# Altium PCB [AD-trans] v1.1_2021-09-27.pcbdoc
Units mm, origin at the board's own origin, x right, y up, seen from the top; angles counter-clockwise.
Board outline 149.35 x 127.63 mm, 2 copper layers (Top Layer, Bottom Layer); 27 components, 25 nets, 133 pads, 149 vias.
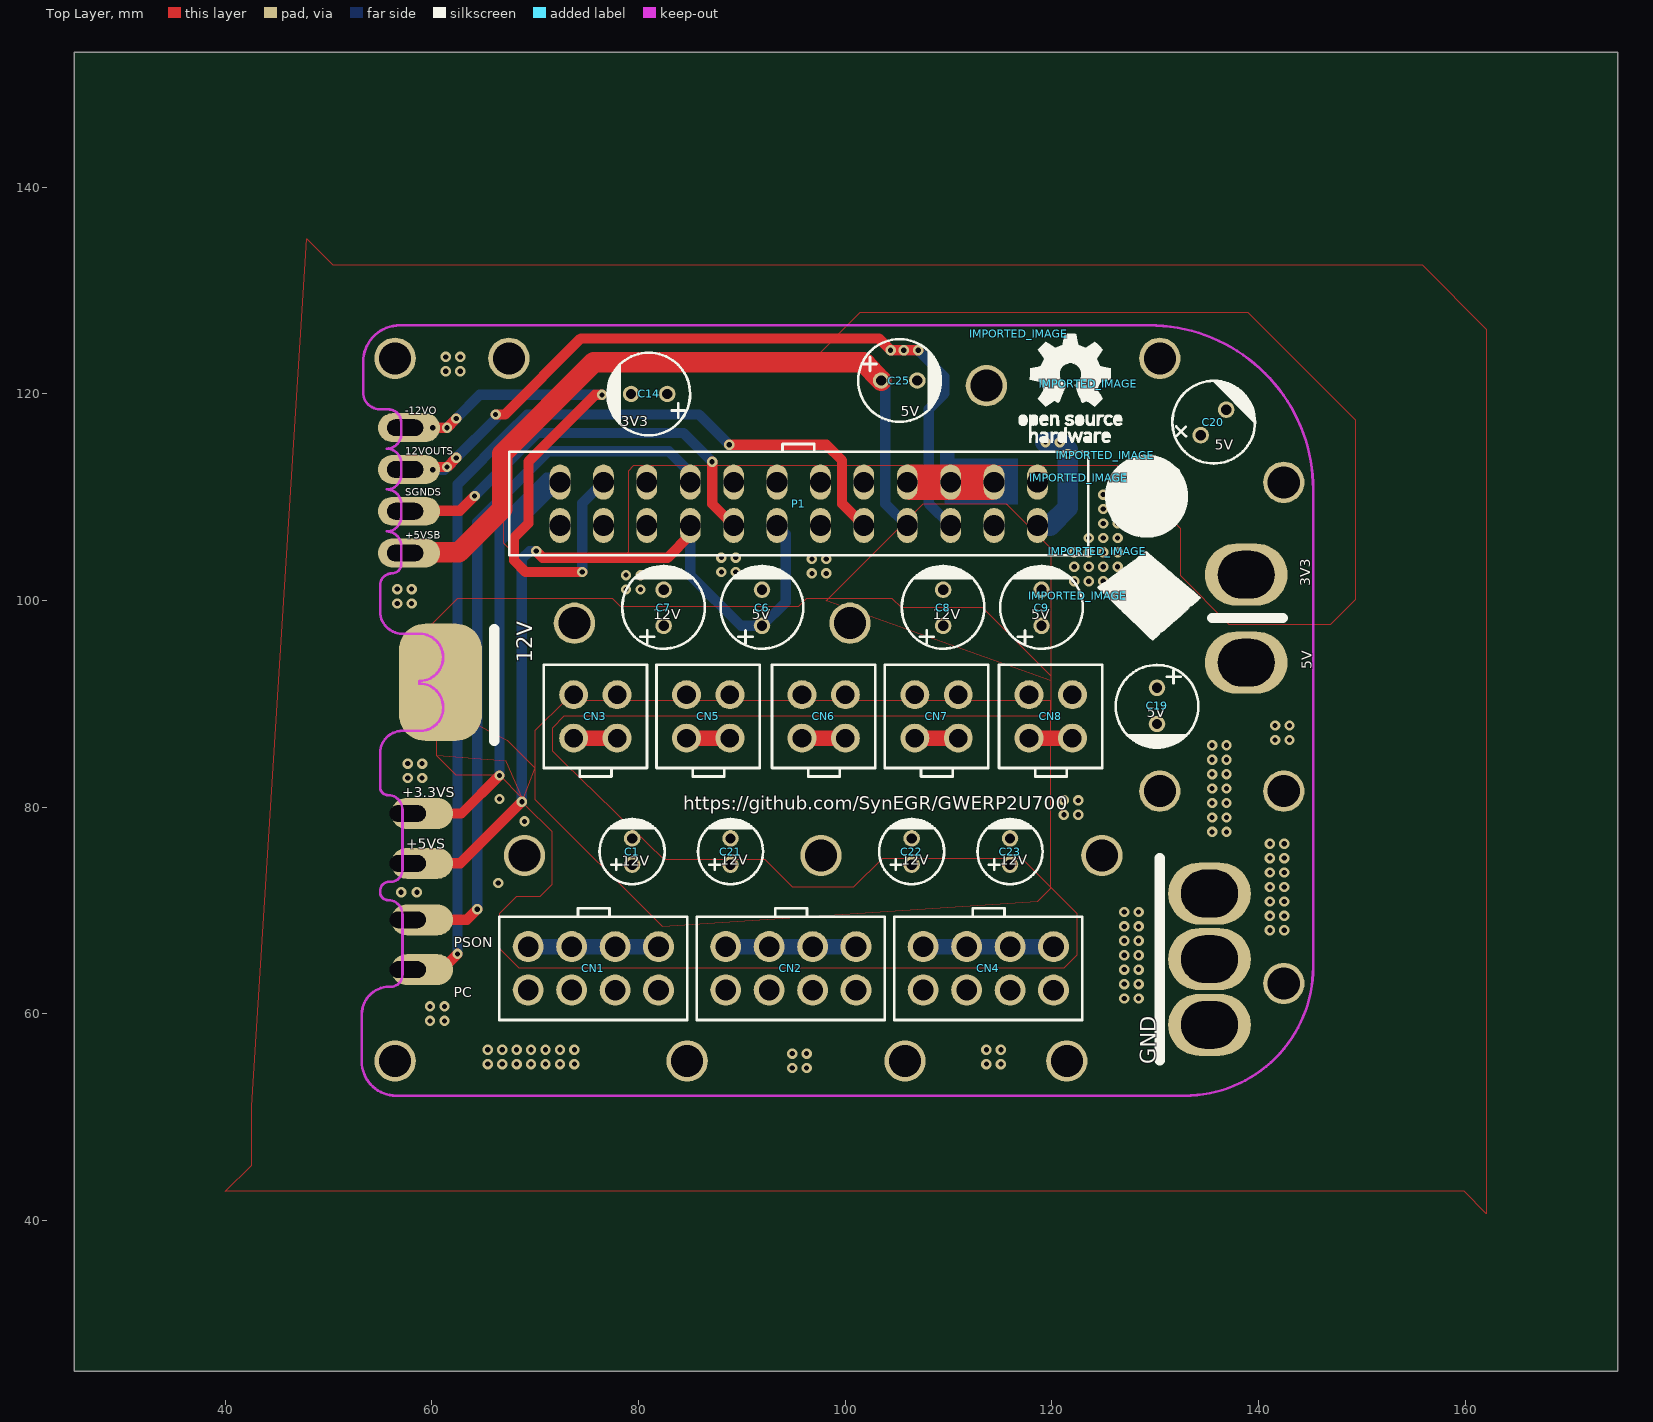
[diagram p0: Top Layer view]
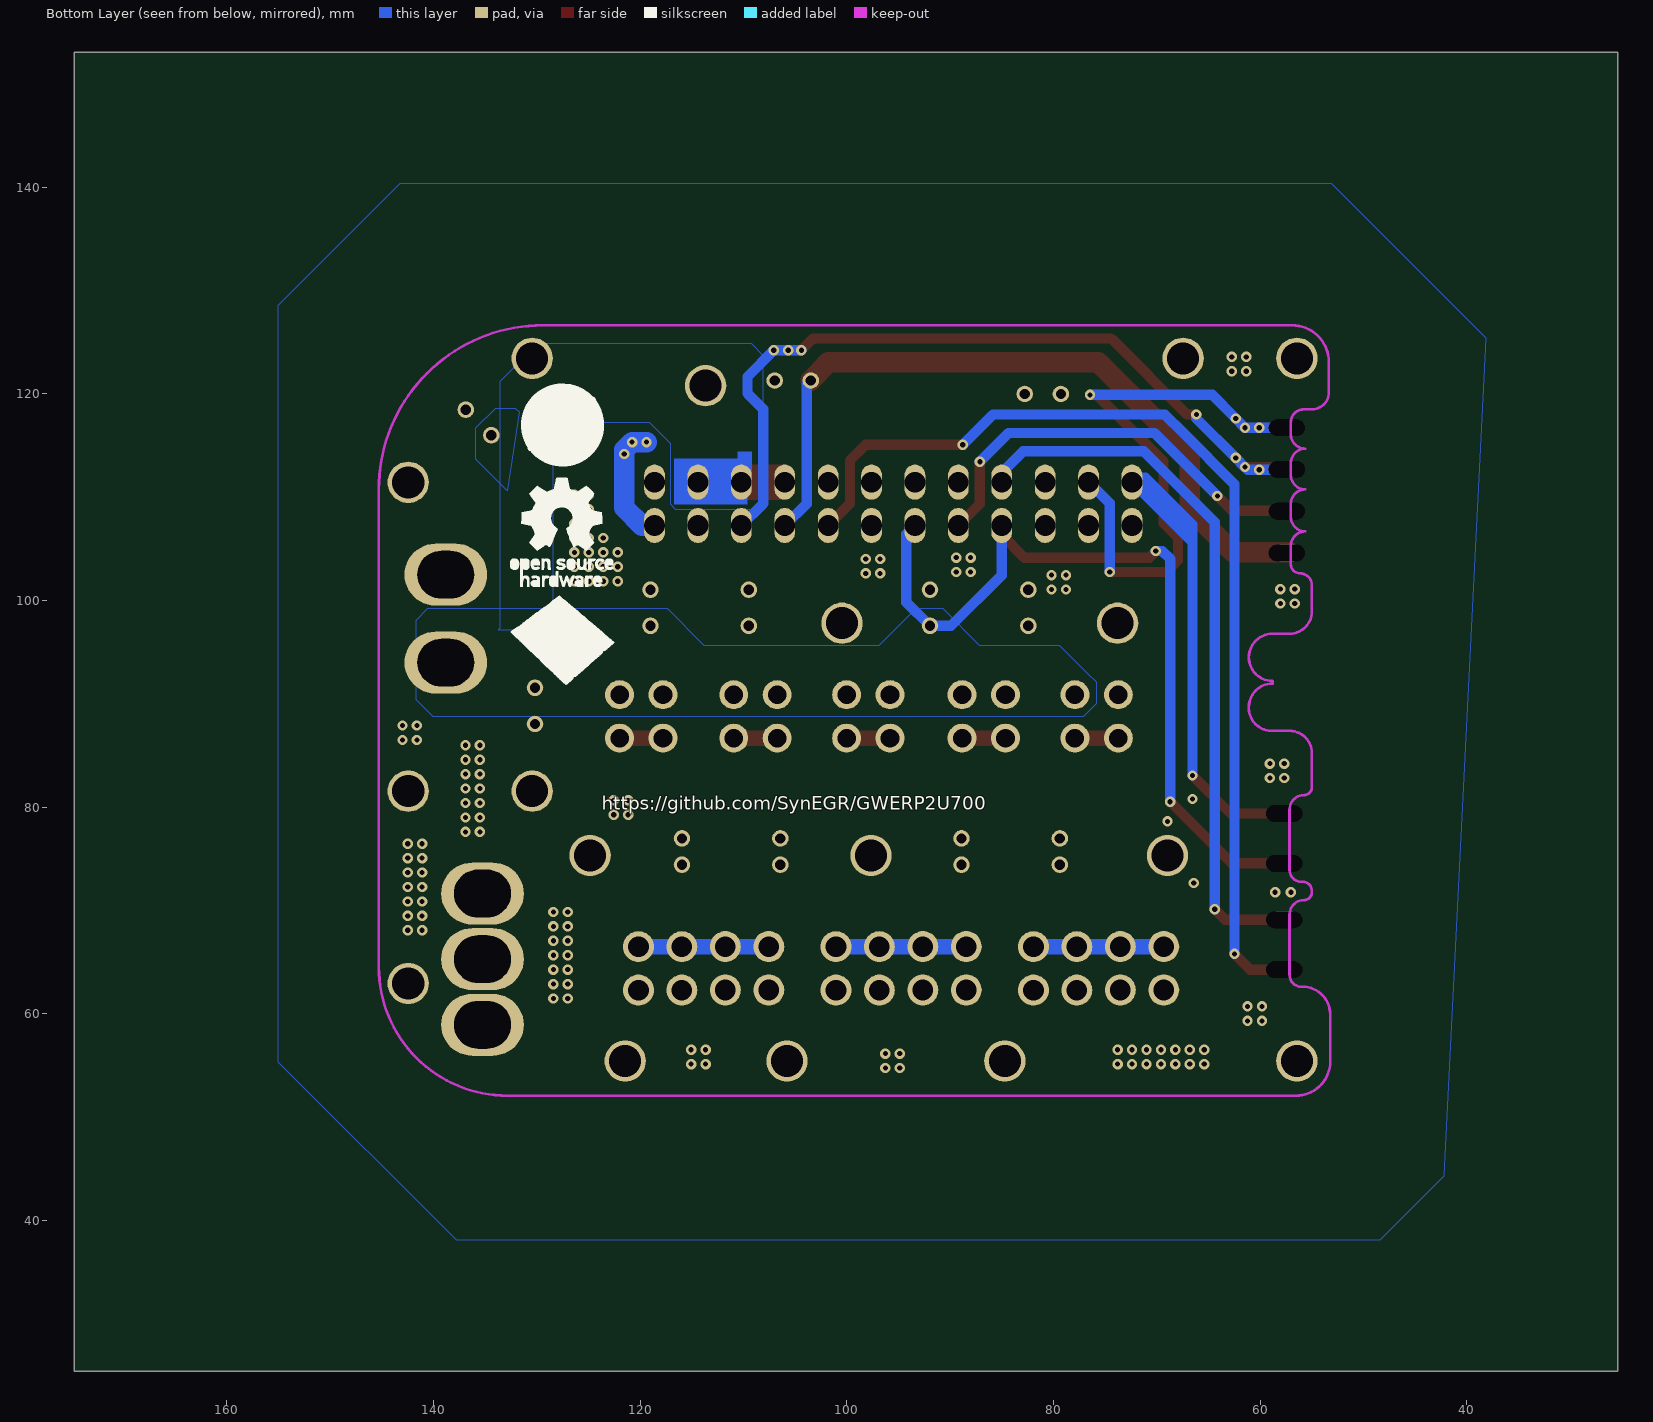
[diagram p1: Bottom Layer view, seen from below]

## Layer stack, top to bottom
Top Layer: signal copper (thickness not stored)
Dielectric: dielectric 0.32, FR-4, Dk 4.8
Bottom Layer: signal copper (thickness not stored)

## Board outline
174.752,25.4 25.4,25.4 25.4,153.035 174.752,153.035

## Components (designator, comment, footprint, x,y, rotation, side; value= is the part's Value field where it differs from the comment)
C1 "CAP-TH_BD6.3-P2.50-D1.0-FD" CAP-TH_BD6.3-P2.50-D1.0-FD 79.375,75.692 r90 top
C6 "CAP-TH_BD8.0-P3.50-D0.6-FD" CAP-TH_BD8.0-P3.50-D0.6-FD 91.948,99.286 r90 top
C7 "CAP-TH_BD8.0-P3.50-D0.6-FD" CAP-TH_BD8.0-P3.50-D0.6-FD 82.423,99.286 r90 top
C8 "CAP-TH_BD8.0-P3.50-D0.6-FD" CAP-TH_BD8.0-P3.50-D0.6-FD 109.474,99.286 r90 top
C9 "CAP-TH_BD8.0-P3.50-D0.6-FD" CAP-TH_BD8.0-P3.50-D0.6-FD 118.999,99.286 r90 top
C14 "CAP-TH_BD8.0-P3.50-D0.6-FD" CAP-TH_BD8.0-P3.50-D0.6-FD 81.026,119.976 r180 top
C19 "CAP-TH_BD8.0-P3.50-D0.6-FD" CAP-TH_BD8.0-P3.50-D0.6-FD 130.175,89.789 r270 top
C20 "CAP-TH_BD8.0-P3.50-D0.6-FD" CAP-TH_BD8.0-P3.50-D0.6-FD 135.636,117.221 r45 top
C21 "CAP-TH_BD6.3-P2.50-D1.0-FD" CAP-TH_BD6.3-P2.50-D1.0-FD 88.9,75.692 r90 top
C22 "CAP-TH_BD6.3-P2.50-D1.0-FD" CAP-TH_BD6.3-P2.50-D1.0-FD 106.426,75.692 r90 top
C23 "CAP-TH_BD6.3-P2.50-D1.0-FD" CAP-TH_BD6.3-P2.50-D1.0-FD 115.951,75.692 r90 top
C25 "CAP-TH_BD8.0-P3.50-D0.6-FD" CAP-TH_BD8.0-P3.50-D0.6-FD 105.223,121.279 r0 top
CN1 "CONN-TH_HAA420A-8A" CONN-TH_HAA420A-8A 75.629,64.389 r0 top
CN2 "CONN-TH_HAA420A-8A" CONN-TH_HAA420A-8A 94.742,64.389 r0 top
CN3 "CONN-TH_HAA420A-4A" CONN-TH_HAA420A-4A 75.819,88.773 r180 top
CN4 "CONN-TH_HAA420A-8A" CONN-TH_HAA420A-8A 113.855,64.389 r0 top
CN5 "CONN-TH_HAA420A-4A" CONN-TH_HAA420A-4A 86.741,88.773 r180 top
CN6 "CONN-TH_HAA420A-4A" CONN-TH_HAA420A-4A 97.917,88.773 r180 top
CN7 "CONN-TH_HAA420A-4A" CONN-TH_HAA420A-4A 108.839,88.773 r180 top
CN8 "CONN-TH_HAA420A-4A" CONN-TH_HAA420A-4A 119.888,88.773 r180 top
IMPORTED_IMAGE "IMPORTED_IMAGE" IMPORTED_IMAGE 122.509,100.449 r0 top
IMPORTED_IMAGE "IMPORTED_IMAGE" IMPORTED_IMAGE 122.579,111.862 r0 top
IMPORTED_IMAGE "IMPORTED_IMAGE" IMPORTED_IMAGE 123.512,120.948 r0 top
IMPORTED_IMAGE "IMPORTED_IMAGE" IMPORTED_IMAGE 116.793,125.796 r0 top
IMPORTED_IMAGE "IMPORTED_IMAGE" IMPORTED_IMAGE 125.163,114.053 r0 top
IMPORTED_IMAGE "IMPORTED_IMAGE" IMPORTED_IMAGE 124.414,104.767 r0 top
P1 "CONN-TH_4.2-2X12A" CONN-TH_4.2-2X12A 95.504,109.347 r0 top

## Footprints (in the part's own frame and the unit in brackets; to place one, negate y for a bottom-side part, rotate by r counter-clockwise, add the part's x,y. Pads: shape width x height; smd on the part's side, far side on the other; paste and mask are expansions set on the pad)
CAP-TH_BD6.3-P2.50-D1.0-FD [mm]
  round 1.6 hole 1: 1(-1.27,0) 2(1.27,0)
  silkscreen extent -3.15,-3.15 3.17,3.15
CAP-TH_BD8.0-P3.50-D0.6-FD [mm]
  round 1.6 hole 1: 1(-1.75,0) 2(1.75,0)
  silkscreen extent -3.96,-4 4.04,4
CONN-TH_4.2-2X12A [mm]
  oval 2x3.4 hole 2: 1(-23.1,-2.1) 2(-23.1,2.1) 3(-18.9,-2.1) 4(-18.9,2.1) 5(-14.7,-2.1) 6(-14.7,2.1) 7(-10.5,-2.1) 8(-10.5,2.1) 9(-6.3,-2.1) 10(-6.3,2.1) 11(-2.1,-2.1) 12(-2.1,2.1) 13(2.1,-2.1) 14(2.1,2.1) 15(6.3,-2.1) 16(6.3,2.1) 17(10.5,-2.1) 18(10.5,2.1) 19(14.7,-2.1) 20(14.7,2.1) 21(18.9,-2.1) 22(18.9,2.1) 23(23.1,-2.1) 24(23.1,2.1)
  silkscreen extent -28.03,-4.99 28.02,5.78
CONN-TH_HAA420A-4A [mm]
  round 2.8 hole 1.8: 1(-2.101,-2.101) 2(-2.101,2.101) 3(2.101,-2.101) 4(2.101,2.101)
  silkscreen extent -5,-5 5,5.82
CONN-TH_HAA420A-8A [mm]
  round 3 hole 2: 1(-6.306,-2.095) 2(-6.306,2.106) 3(-2.104,-2.095) 4(-2.104,2.106) 5(2.104,-2.106) 6(2.104,2.095) 7(6.306,-2.106) 8(6.306,2.095)
  silkscreen extent -9.1,-5 9.1,5.82
IMPORTED_IMAGE [mm]

## Free pads (board coordinates)
  round 4 hole 3.1: 2(56.443,55.427) 2(56.443,123.427) 2(67.443,123.427) 2(68.961,75.311) 2(73.787,97.79) 2(84.709,55.427) 2(97.663,75.311) 2(100.457,97.79) 2(105.791,55.427) 2(113.665,120.777) 2(121.443,55.427) 2(124.841,75.311) 2(130.443,81.534) 2(130.443,123.427) 2(142.443,62.927) 2(142.443,111.427) 2(142.443,81.534)
  oval 6x2.8 smd: 4(57.785,104.586) 4(57.785,108.628) 4(57.785,112.671) 4(57.785,116.713)
  oval 6x3 smd: 4(59.055,64.262) 4(59.055,69.088) 4(59.055,74.549) 4(59.055,79.375)
  oval 8x5 smd: 5(60.833,88.9) 5(60.833,95.25)
  rect 8x7 smd: 5(60.833,92.075)
  oval 8x6 hole 4.6 slot 5.5 at 0 deg: 6(135.255,58.928) 6(135.255,65.278) 6(135.255,71.628) 6(138.811,93.98) 6(138.811,102.489)
  oval 3x1.6 hole 1.6 slot 3.5 at 0 deg: 8(57.404,104.586) 8(57.404,108.628) 8(57.404,112.671) 8(57.404,116.713) 8(57.658,64.262) 8(57.658,69.088) 8(57.658,74.549) 8(57.658,79.375)

## Via types
v1: diameter 1, hole 0.5, Top Layer to Bottom Layer, 149 vias

## Nets (pads, with @x,y where several pads share a name; then routed paths per layer and width w, separated by ;. In a path a pad name is that pad's centre, name@x,y a point inside that pad or via, vN(x,y) a via of type N, cw(c..) or ccw(c..) an arc to the next point about the centre after c; other vN are vias at no path point)
+3.3V: C14.1 P1.1 P1.2 P1.3 P1.23 pad.6@138.811,102.489 | length 62.2
  Bottom Layer w1: 66.548,83.058 66.548,106.426 71.569,111.447 P1.2 ; 66.548,104.267 66.548,105.664 72.331,111.447 P1.2 ; 66.548,105.682 66.548,107.315 71.12,111.887 71.964,111.887 P1.2
  Bottom Layer w2: P1.23 119.82,107.247 121.539,108.966 v1(121.539,114.173) 121.539,114.554 v1(120.777,115.316) v1(119.38,115.316)
+3.3VS: pad.4@59.055,79.375 pad.8@57.658,64.262 pad.8@57.658,69.088 pad.8@57.658,74.549 pad.8@57.658,79.375 | length 9
  Top Layer w1: pad.4@59.055,79.375 62.865,79.375 v1(66.548,83.058)
+5V: C6.1 C9.1 C19.1 C20.1 CN3.1 CN5.1 CN6.1 CN7.1 CN8.1 P1.7 P1.11 P1.18 P1.20 P1.22 pad.6@138.811,93.98 | length 24.8
  Bottom Layer w1: P1.7 85.004,102.448 89.916,97.536 C6.1 94.234,99.822 94.234,106.417 P1.11
+5VS: pad.4@59.055,74.549 | length 54.3
  Top Layer w1: pad.4@59.055,74.549 62.738,74.549 v1(68.707,80.518) ; v1(70.104,104.775) 70.739,104.14 82.804,104.14 85.004,106.34 85.004,107.246
  Bottom Layer w1: v1(68.707,80.518) 68.707,104.013 69.469,104.775 v1(70.104,104.775)
+5VSB: C25.1 P1.17 pad.4@57.785,104.586 pad.8@57.404,104.586 pad.8@57.404,108.628 pad.8@57.404,112.671 pad.8@57.404,116.713 | length 74.2
  Top Layer w2: pad.4@57.15,104.648 62.611,104.648 66.802,108.839 66.802,114.173 75.692,123.063 101.788,123.063 C25.1
  Bottom Layer w1: C25.1 103.886,120.866 103.886,118.618 ; 103.886,119.888 103.886,118.618 ; P1.17 103.886,109.365 103.886,118.618
+12V: C1.1 C7.1 C8.1 C21.1 C22.1 C23.1 CN1.2 CN1.4 CN1.6 CN1.8 CN2.2 CN2.4 CN2.6 CN2.8 CN3.3 CN4.2 CN4.4 CN4.6 CN4.8 CN5.3 CN6.3 CN7.3 CN8.3 P1.19 P1.21 pad.4@57.785,112.671 pad.5 | length 120.7
  Top Layer w1: pad.4@57.785,112.672 58.016,112.903 v1(61.468,112.903) v1(62.357,113.792) ; v1(66.167,117.983) 67.056,117.983 74.422,125.349 103.251,125.349 v1(104.394,124.206) v1(105.664,124.206) v1(107.061,124.206)
  Bottom Layer w1: 57.404,112.649 v1(60.089,112.649) 61.214,112.649 v1(61.468,112.903) v1(62.357,113.792) 66.167,117.602 v1(66.167,117.983) ; v1(104.394,124.206) v1(107.061,124.206) 109.601,121.666 109.601,120.015 108.077,118.491 108.077,109.374 P1.19
  Bottom Layer w1.5: CN1.2 CN1.4 ; CN1.4 CN1.6 ; CN1.6 CN1.8 ; CN2.2 CN2.4 ; CN2.4@92.636,66.495 CN2.6@96.848,66.484 ; CN2.6 CN2.8 ; CN4.2 CN4.4 ; CN4.4 CN4.6 ; CN4.6 CN4.8
-12VO: P1.4 pad.4@57.785,116.713 | length 61.8
  Top Layer w1: pad.4@57.785,116.713 v1(61.468,116.713) v1(62.357,117.602) ; v1(74.549,102.743) 69.088,102.743 67.945,103.886 67.945,106.045 69.342,107.442 69.342,113.411 75.819,119.888 v1(76.454,119.888)
  Bottom Layer w1: 57.404,116.713 v1(60.089,116.713) v1(61.468,116.713) v1(62.357,117.602) 64.643,119.888 v1(76.454,119.888) ; v1(74.549,102.743) 74.549,109.392 P1.4
NC: P1.16 pad.2
PC: P1.15 pad.4@59.055,64.262 | length 98.5
  Top Layer w1: pad.4@59.055,64.262 60.96,64.262 v1(62.484,65.786) ; v1(88.773,115.062) 98.171,115.062 99.695,113.538 99.695,109.356 P1.15
  Bottom Layer w1: v1(62.484,65.786) 62.484,111.252 67.437,116.205 69.215,117.983 85.852,117.983 v1(88.773,115.062)
PSON: P1.8 pad.4@59.055,69.088 | length 69
  Top Layer w0.256: pad.4@58.801,68.834 cw(c58.928,68.834) pad.4@58.928,68.961
  Top Layer w1: pad.4@59.055,69.088 63.373,69.088 v1(64.389,70.104)
  Bottom Layer w1: v1(64.389,70.104) 64.389,107.569 65.024,108.204 ; 64.77,107.95 71.247,114.427 82.931,114.427 85.004,112.354 P1.8
S$127: 
S$2149: 
S$6759: 
S$6867: 
S$7226: 
S$7485: 
S$7489: 
S$7492: 
S$7495: 
S$8030: 
S$8239: 
S$8668: 
S$8809: 
SGND: C1.2 C6.2 C7.2 C8.2 C9.2 C14.2 C19.2 C20.2 C21.2 C22.2 C23.2 C25.2 CN1.1 CN1.3 CN1.5 CN1.7 CN2.1 CN2.3 CN2.5 CN2.7 CN3.2 CN3.4 CN4.1 CN4.3 CN4.5 CN4.7 CN5.2 CN5.4 CN6.2 CN6.4 CN7.2 CN7.4 CN8.2 CN8.4 P1.5 P1.6 P1.9 P1.10 P1.12 P1.13 P1.14 P1.24 pad.6@135.255,58.928 pad.6@135.255,65.278 pad.6@135.255,71.628 | length 21
  Top Layer w1.5: CN3.4 CN3.2 ; CN5.4 CN5.2 ; CN6.4 CN6.2 ; CN7.4 CN7.2 ; CN8.4 CN8.2
  other v1: 94.869,54.737 96.266,54.737 65.405,55.118 66.802,55.118 68.199,55.118 69.596,55.118 70.993,55.118 72.39,55.118 73.787,55.118 113.665,55.118 115.062,55.118 94.869,56.134 96.266,56.134 65.405,56.515 66.802,56.515 68.199,56.515 69.596,56.515 70.993,56.515 72.39,56.515 73.787,56.515 113.665,56.515 115.062,56.515 59.817,59.309 61.214,59.309 59.817,60.706 61.214,60.706 127,61.468 128.397,61.468 127,62.865 128.397,62.865 127,64.262 128.397,64.262 127,65.659 128.397,65.659 127,67.056 128.397,67.056 141.097,68.072 142.494,68.072 127,68.453 128.397,68.453 141.097,69.469 142.494,69.469 127,69.85 128.397,69.85 141.097,70.866 142.494,70.866 57.023,71.755 58.547,71.755 141.097,72.263 142.494,72.263 66.421,72.644 141.097,73.66 142.494,73.66 141.097,75.057 142.494,75.057 141.097,76.454 142.494,76.454 135.509,77.597 136.906,77.597 68.961,78.613 135.509,78.994 136.906,78.994 121.158,79.248 122.555,79.248 135.509,80.391 136.906,80.391 121.158,80.645 122.555,80.645 66.548,80.772 135.509,81.788 136.906,81.788 57.658,82.804 59.055,82.804 135.509,83.185 136.906,83.185 57.658,84.201 59.055,84.201 135.509,84.582 136.906,84.582 135.509,85.979 136.906,85.979 141.605,86.487 143.002,86.487 141.605,87.884 143.002,87.884 56.642,99.695 58.039,99.695 78.788,101.049 80.185,101.049 56.642,101.092 58.039,101.092 122.174,101.854 123.571,101.854 124.968,101.854 126.365,101.854 78.788,102.446 80.185,102.446 96.774,102.616 98.171,102.616 88.011,102.743 89.408,102.743 122.174,103.251 123.571,103.251 124.968,103.251 126.365,103.251 96.774,104.013 98.171,104.013 88.011,104.14 89.408,104.14 122.174,104.648 123.571,104.648 124.968,104.648 126.365,104.648 123.571,106.045 124.968,106.045 126.365,106.045 124.968,107.442 126.365,107.442 124.968,108.839 126.365,108.839 124.968,110.236 126.365,110.236 61.341,122.174 62.738,122.174 61.341,123.571 62.738,123.571
SGNDS: pad.4@57.785,108.628 | length 40.3
  Top Layer w1: pad.4@58.166,108.689 62.715,108.689 v1(64.135,110.109) ; v1(87.122,113.411) 87.122,109.329 89.204,107.247
  Bottom Layer w1: v1(64.135,110.109) 70.231,116.205 84.328,116.205 v1(87.122,113.411)

## Polygon pours and split planes (outlines as drawn)
+12V on Top Layer (solid): 60.071,97.79 62.484,100.203 77.47,100.203 78.232,99.441 95.504,99.441 96.266,100.203 100.33,100.203 104.521,100.203 105.41,99.314 113.284,99.314 119.888,92.71 119.888,89.408 119.253,88.773 72.771,88.773 71.628,87.63 71.628,85.471 72.771,84.328 82.423,74.93 92.202,74.93 94.869,72.263 100.838,72.263 103.632,75.057 117.094,75.057 122.428,69.723 122.428,65.659 121.158,64.389 68.453,64.389 66.548,66.294 66.548,69.723 68.199,71.374 70.485,71.374 71.628,72.517 71.628,77.597 69.088,80.137 67.183,84.455 60.452,84.963 60.452,86.36 57.277,88.138 57.277,95.504 57.658,95.885
+12V on Top Layer (solid): 98.171,99.949 107.569,109.347 110.871,109.347 115.57,109.347 116.586,108.331 119.888,105.029 119.888,92.202
+3.3V on Top Layer (solid): 68.199,104.267 66.929,105.537 66.929,109.855 66.929,114.554 75.438,123.063 96.647,123.063 101.473,127.889 138.938,127.889 149.352,117.475 149.352,100.076 146.939,97.663 137.16,97.663 132.461,102.362 132.461,106.934 130.683,108.712 126.365,113.03 108.712,113.03 79.502,113.03 78.994,112.522 78.994,104.648 78.74,104.394
+5V on Bottom Layer (solid): 77.597,88.773 77.089,88.773 75.819,90.043 75.819,92.075 76.708,92.964 79.375,95.631 82.55,95.631 87.122,95.631 90.678,99.187 93.345,99.187 96.901,95.631 113.792,95.631 117.348,99.187 140.589,99.187 141.732,98.044 141.732,90.424 140.081,88.773
+5V on Bottom Layer (solid): 108.712,108.712 108.077,109.347 108.077,116.84 108.077,123.698 109.22,124.841 129.921,124.841 133.604,121.158 133.604,97.282 133.731,97.155 128.524,97.155 128.397,97.282 128.397,115.062 126.238,117.221 119.126,117.221 117.094,115.189 117.094,109.347 116.586,108.839 109.347,108.839 109.093,108.585
SGND on Top Layer (solid): 47.879,135.001 50.419,132.461 155.829,132.461 162.052,126.238 162.052,40.64 159.893,42.799 40.005,42.799 42.545,45.339 42.545,51.054
SGND on Bottom Layer (solid): 38.1,125.349 53.086,140.335 59.309,140.335 143.256,140.335 155.067,128.524 155.067,55.372 137.795,38.1 48.387,38.1 42.164,44.323
+5V on Bottom Layer (solid): 132.842,110.617 135.89,113.665 135.89,116.205 135.89,116.713 133.985,118.618 132.08,118.618 131.699,118.237
+12V on Top Layer (solid): 68.707,80.518 68.707,80.899 66.548,83.058 62.357,83.058 60.452,84.963 60.452,87.249 61.849,89.281 67.31,86.487 69.977,83.82
+12V on Top Layer (solid): 118.618,70.866 119.888,72.136 119.888,90.297 72.898,90.297 69.977,87.376 69.977,80.772 82.296,68.453

## Keep-outs
Keep-Out Layer:
  lines w0.254 net S$127: 53.213,55.372 ccw(c56.515,55.372) 56.515,52.07 ; 53.213,59.34 cw(c53.221,59.34) 53.221,59.348 ; 53.338,120.144 ccw(c54.991,120.144) 54.991,118.491 ; 53.338,120.904 ccw(c53.338,120.906) 53.34,120.906 ; 53.34,123.063 cw(c56.896,123.063) 56.896,126.619 ; 54.991,71.755 ccw(c55.753,71.755) 55.753,70.993 cw(c55.753,69.596) 57.15,69.596 ; 54.991,71.882 cw(c55.88,71.882) 55.88,72.771 ; 54.991,81.915 ccw(c55.753,81.915) 55.753,81.153 cw(c55.753,79.756) 57.15,79.756 ; 54.991,101.473 cw(c56.134,101.473) 56.134,102.616 ccw(c56.134,103.505) 57.023,103.505 ; 55.753,118.491 cw(c55.753,117.221) 57.023,117.221 ; 56.007,62.611 ccw(c56.007,63.754) 57.15,63.754 ; 56.007,72.771 ccw(c56.007,73.914) 57.15,73.914 ; 57.023,105.283 ccw(c55.626,105.283) 55.626,106.68 ccw(c55.626,108.077) 57.023,108.077 ; 57.023,109.347 ccw(c55.626,109.347) 55.626,110.744 ccw(c55.626,112.141) 57.023,112.141 ; 57.023,113.284 ccw(c55.626,113.284) 55.626,114.681 ccw(c55.626,116.078) 57.023,116.078 ; 129.413,126.619 cw(c129.413,110.744) 145.288,110.744 ; 132.842,52.07 ccw(c132.842,64.516) 145.288,64.516
  lines w0.254 net S$6759: 54.991,85.217 cw(c57.15,85.217) 57.15,87.376 ; 54.991,98.933 ccw(c57.15,98.933) 57.15,96.774
  lines w0.254 net S$7226: 58.704,87.376 ccw(c58.704,87.378) 58.706,87.378
  lines w0.254 net S$7485: 58.78,96.774 cw(c58.78,94.47) 61.083,94.47
  lines w0.254 net S$7489: 58.801,92.202 ccw(c58.801,94.488) 61.087,94.488
  lines w0.254 net S$7492: 58.801,91.948 cw(c58.801,89.662) 61.087,89.662
  lines w0.254 net S$7495: 58.888,87.378 ccw(c58.888,89.576) 61.087,89.576
  lines w0.256 net S$127: 53.221,59.952 cw(c55.88,59.952) 55.88,62.611

## Other copper
Top Layer:
  rectangle: 106.045,109.728 114.427,113.157
Bottom Layer:
  rectangle net +5V: 109.601,109.283 116.713,113.728
  rectangle net +5V: 109.156,110.617 110.553,114.427

## Silkscreen, mask and mechanical layers (free items; w line width, h text height)
Top Overlay:
  lines w1 net S$2149: 130.429,55.499 130.429,62.357 ; 130.429,61.849 130.429,68.707 ; 130.429,68.199 130.429,75.057 ; 135.509,98.298 142.367,98.298
  lines w1 net S$8030: 66.04,86.423 66.04,97.218
  text "-12VO" at 57.404,118.014 h0.7
  text "5V" at 105.382,117.837 h1
  text "3V3" at 78.287,116.848 h1
  text "5V" at 135.763,114.562 h1
  text "12VOUTS" at 57.404,114.077 h0.7
  text "SGNDS" at 57.404,110.14 h0.7
  text "+5VSB" at 57.404,105.949 h0.7
  text "3V3" at 145.026,101.346 h1 r90
  text "12V" at 81.407,98.179 h1
  text "5V" at 90.932,98.179 h1
  text "12V" at 108.458,98.179 h1
  text "5V" at 117.983,98.179 h1
  text "12V" at 69.711,93.98 h1.5 r90
  text "5V" at 145.153,93.345 h1 r90
  text "5V" at 129.159,88.682 h1
  text "+3.3VS" at 57.15,80.969 h1
  text "https://github.com/SynEGR/GWERP2U700" at 84.328,79.741 h1.3
  text "+5VS" at 57.531,75.953 h1
  text "12V" at 87.884,74.43 h1
  text "12V" at 105.41,74.43 h1
  text "12V" at 114.935,74.43 h1
  text "12V" at 78.359,74.303 h1
  text "PSON" at 62.103,66.429 h1
  text "PC" at 62.103,61.603 h1
  text "GND" at 130.036,55.118 h1.5 r90
Bottom Overlay:
  text "https://github.com/SynEGR/GWERP2U700" at 123.698,79.741 h1.3
Top Paste:
  lines w1 net S$8239: 67.437,85.217 74.549,78.105
  lines w1 net S$8809: 84.836,115.951 87.757,118.872 99.441,118.872 102.489,115.824 109.601,115.824
Bottom Paste:
  lines w1 net +5V: 85.004,107.247 85.004,102.448 89.916,97.536 91.948,97.536 94.234,99.822 94.234,106.417 93.404,107.247
  lines w1 net +5VSB: 103.472,121.279 103.886,120.866 103.886,118.618 ; 103.886,119.888 103.886,118.618 ; 106.004,107.246 103.886,109.365 103.886,118.618
  lines w1 net S$8668: 70.612,94.107 70.612,93.091 70.612,83.693 74.168,80.137
Top Solder:
  lines w1 net S$8239: 67.437,85.217 74.549,78.105
  lines w1 net S$8809: 84.836,115.951 87.757,118.872 99.441,118.872 102.489,115.824 109.601,115.824
Bottom Solder:
  lines w1 net +5V: 85.004,107.247 85.004,102.448 89.916,97.536 91.948,97.536 94.234,99.822 94.234,106.417 93.404,107.247
  lines w1 net +5VSB: 103.472,121.279 103.886,120.866 103.886,118.618 ; 103.886,119.888 103.886,118.618 ; 106.004,107.246 103.886,109.365 103.886,118.618
  lines w1 net S$8668: 70.612,94.107 70.612,93.091 70.612,83.693 74.168,80.137